# Altium PCB HSOW2.PcbDoc
Units mm, origin at the board's own origin, x right, y up, seen from the top; angles counter-clockwise.
Board outline 64 x 74 mm, 2 copper layers (Top Layer, Bottom Layer); 72 components, 62 nets, 292 pads, 75 vias.
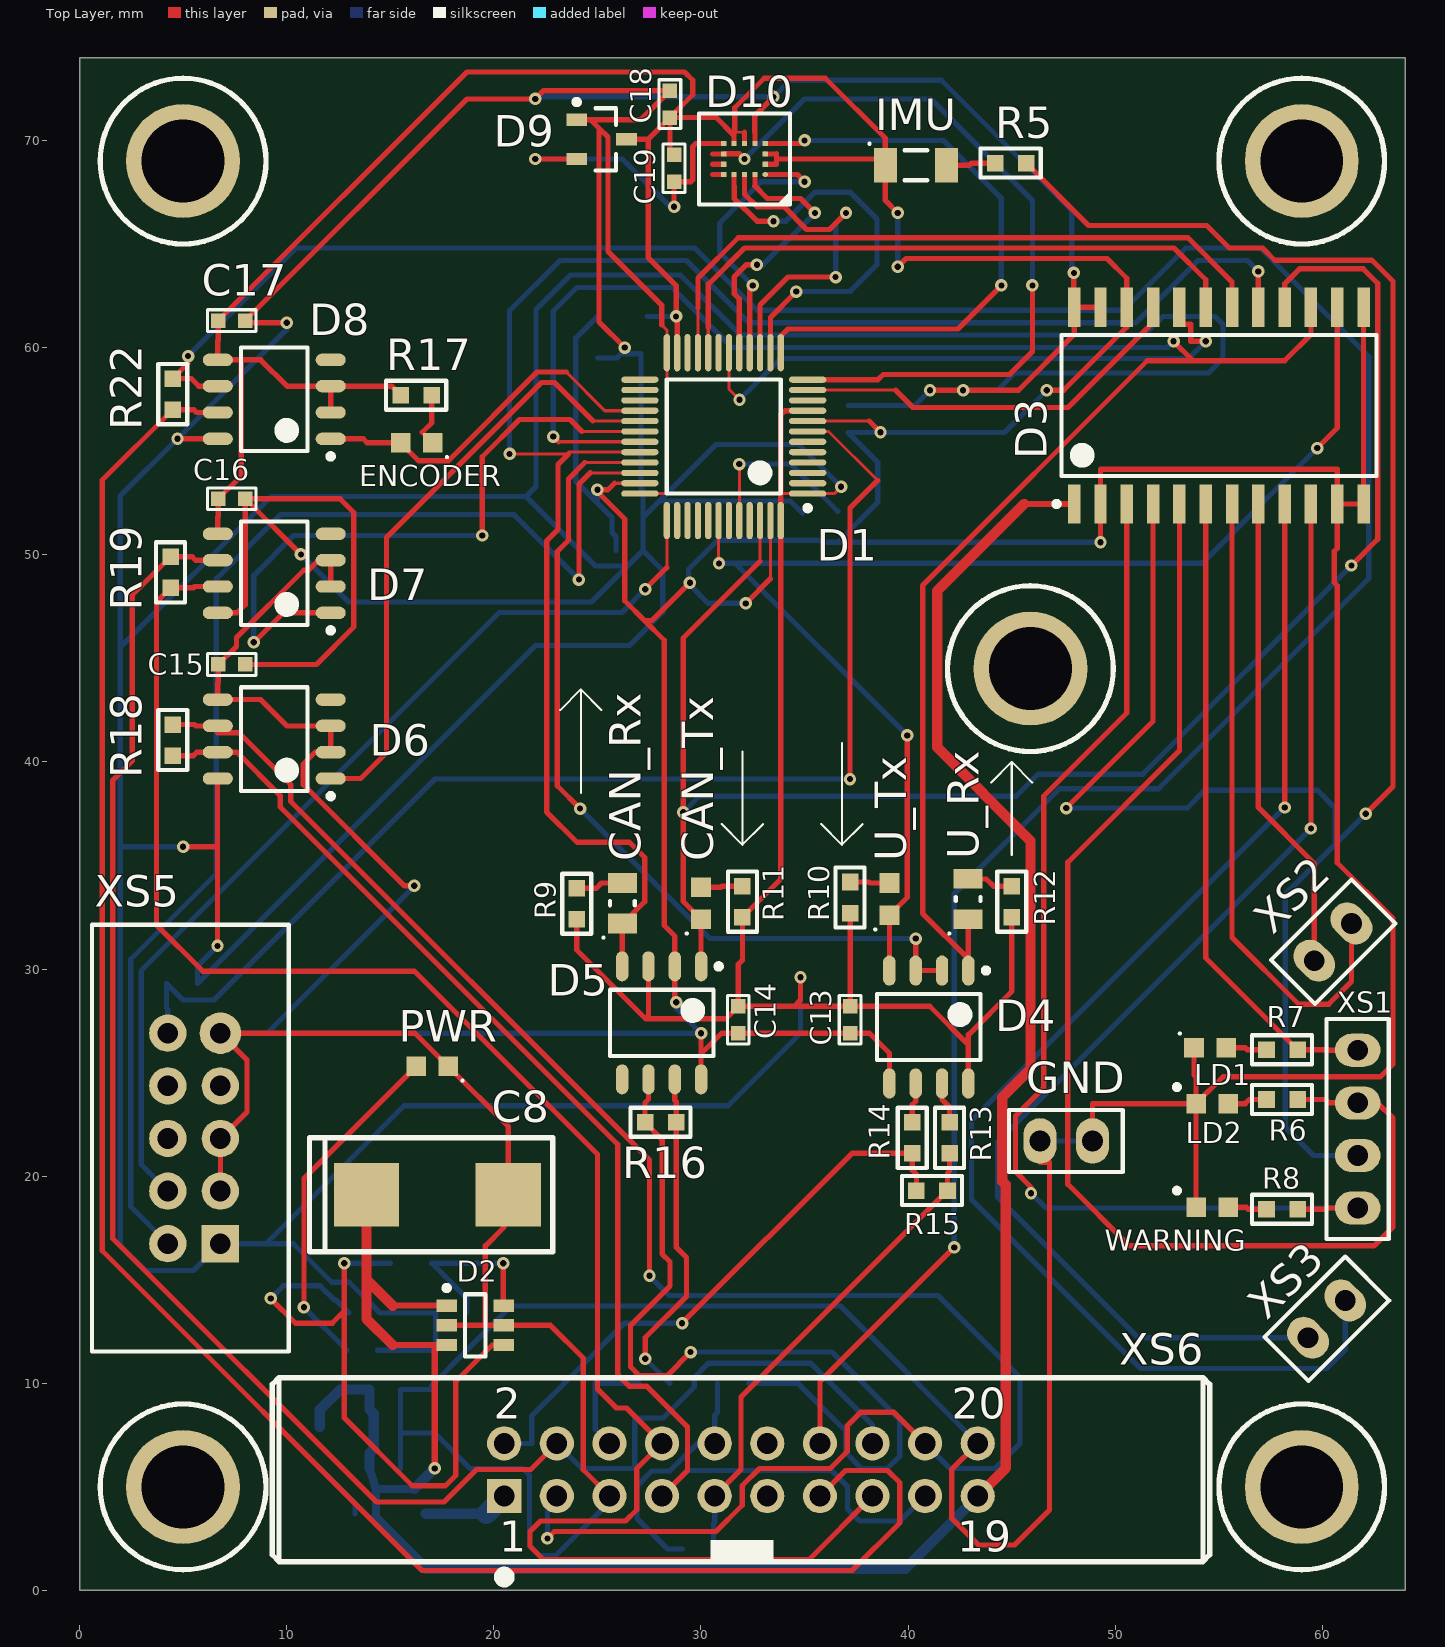
[diagram p0: Top Layer view]
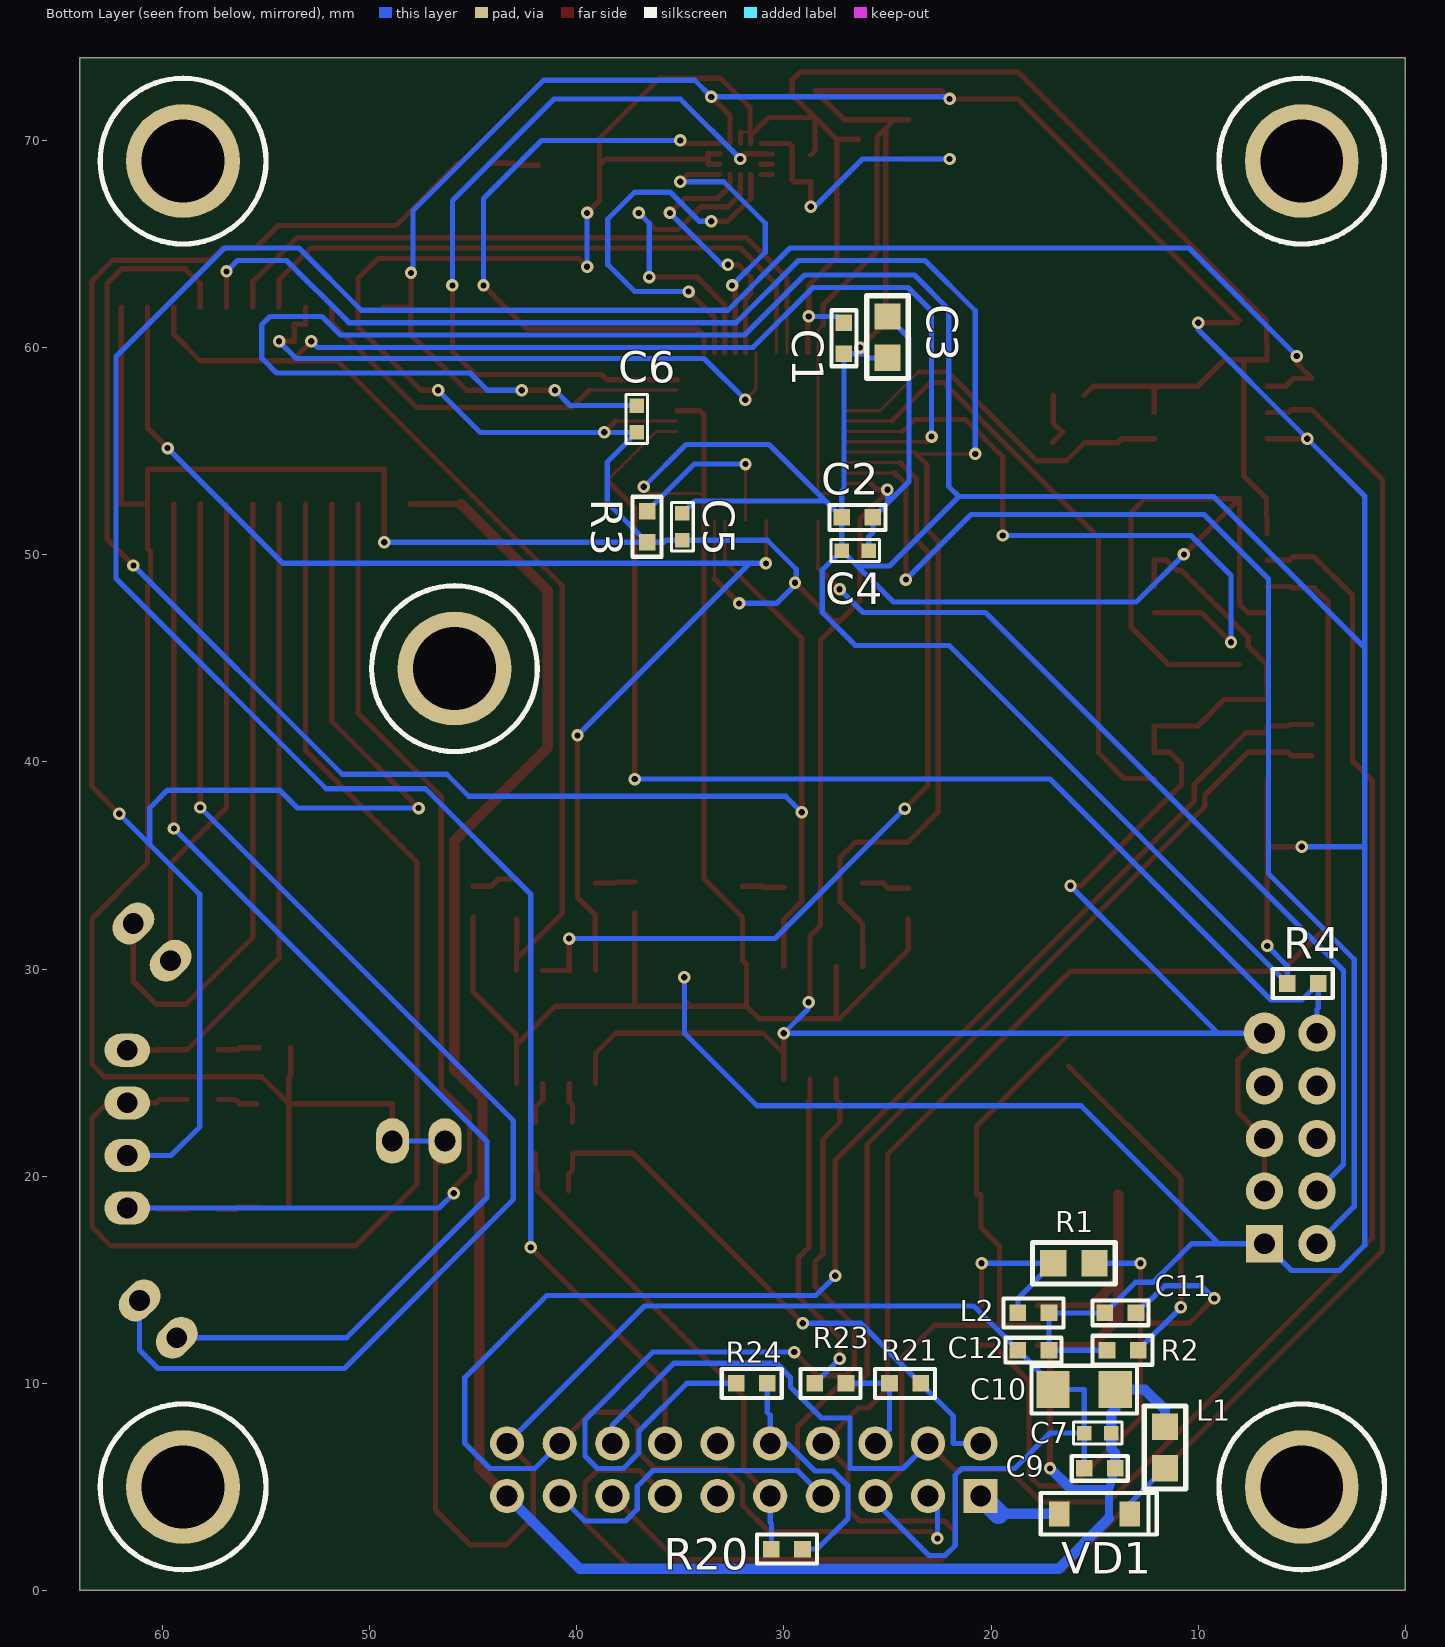
[diagram p1: Bottom Layer view, seen from below]
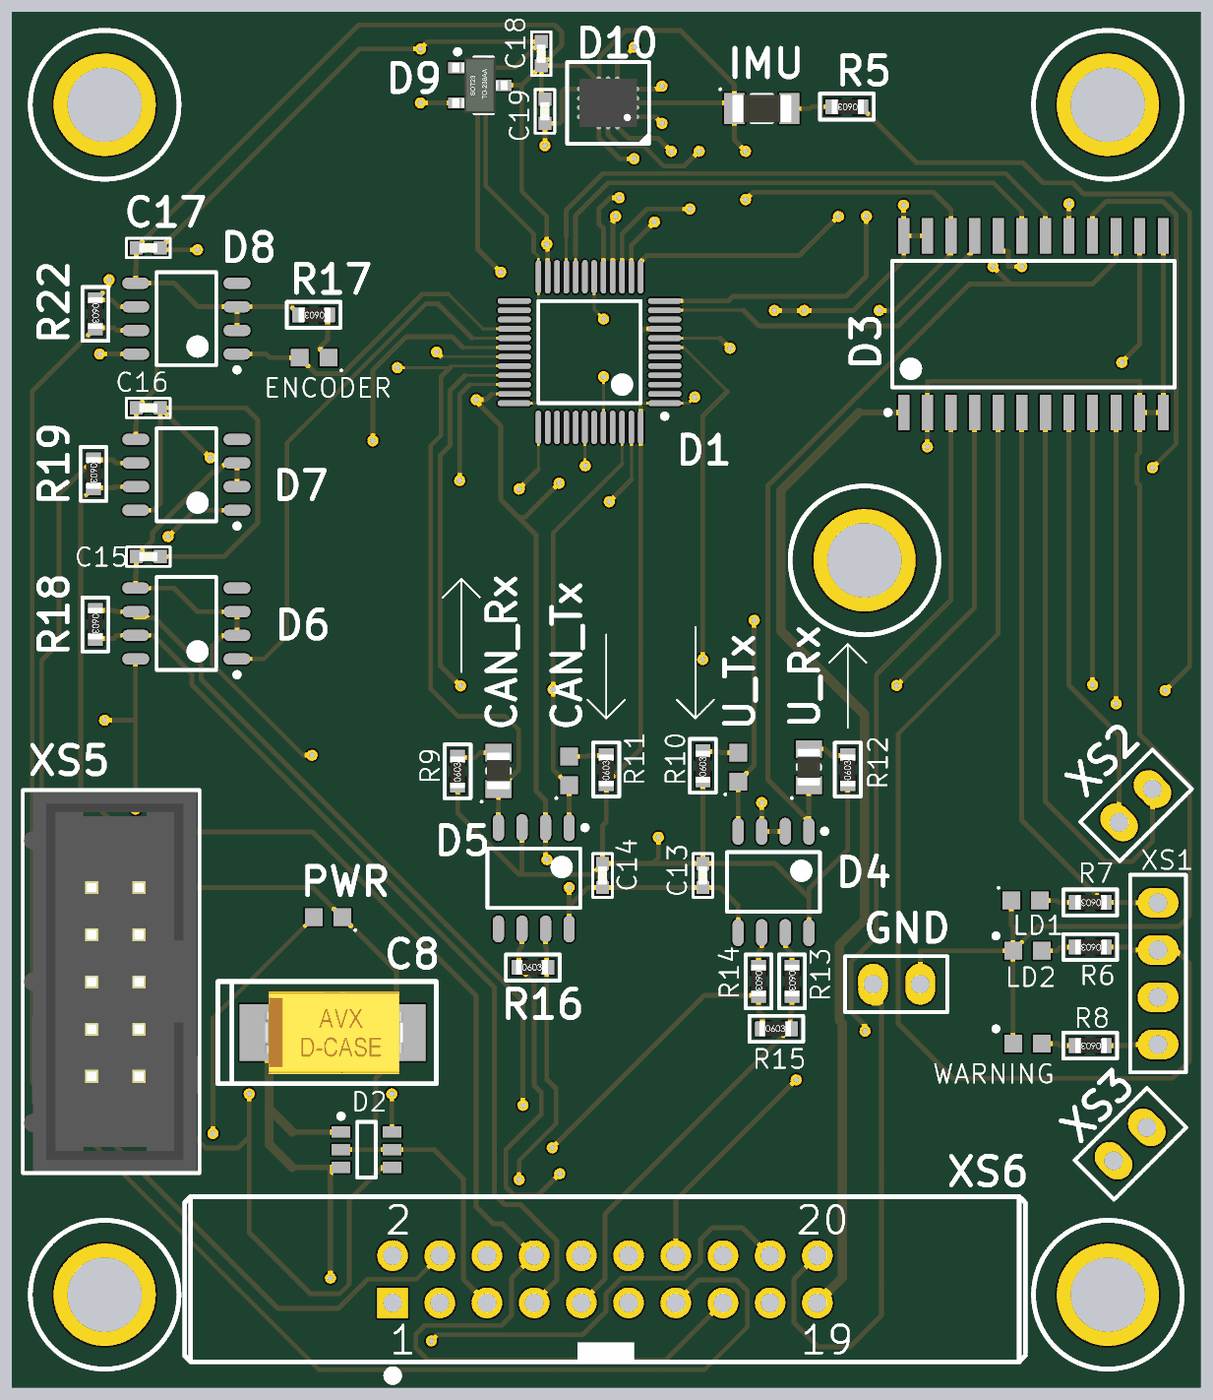
[diagram p2: 3D render of the assembled board from above, using the file's embedded part models]
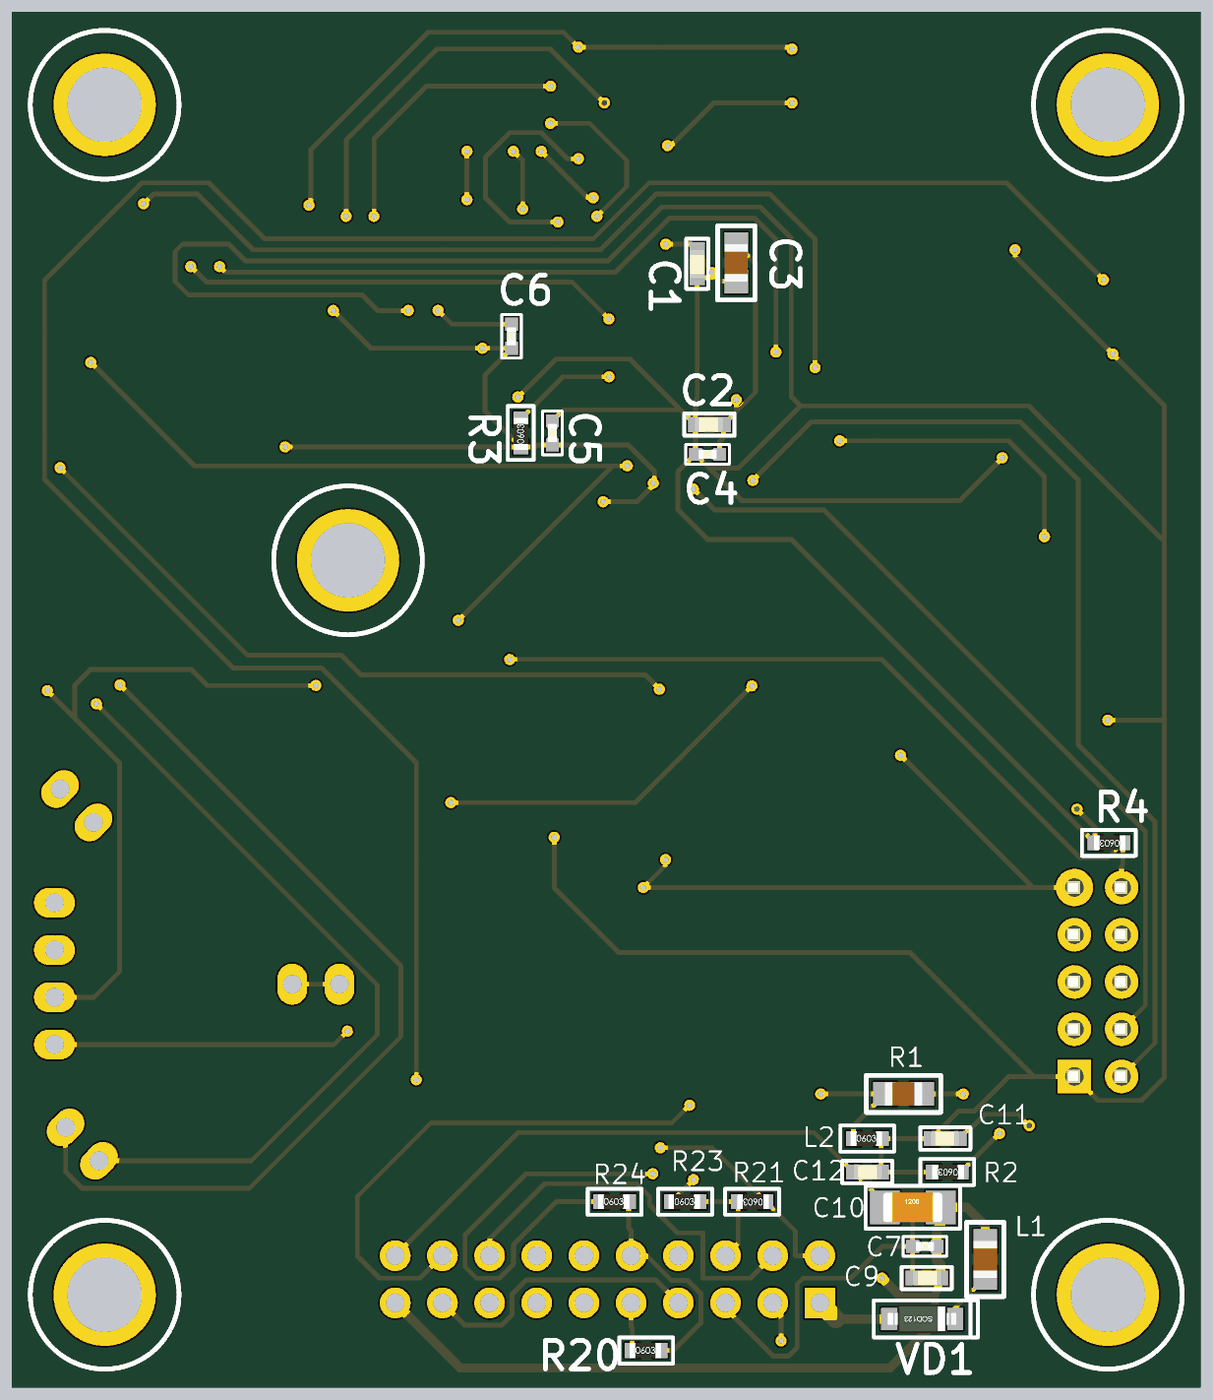
[diagram p3: 3D render of the assembled board from below, using the file's embedded part models]

## Layer stack, top to bottom
Top Solder: solder mask 0.0102, Solder Resist, Dk 3.5
Top Layer: signal copper 0.0356
Dielectric 1: dielectric 0.32, FR-4, Dk 4.8
Bottom Layer: signal copper 0.0356
Bottom Solder: solder mask 0.0102, Solder Resist, Dk 3.5

## Board outline
0,0 64,0 64,74 0,74

## Design rules (kind name [scope] priority, off if disabled: settings)
Clearance Clearance_Poly_VIA_0.4 [All] p1: gap=0.1 except(0.124: Arc-SMDPad Arc-THPad Track-Track Track-SMDPad Track-THPad SMDPad-THPad THPad-THPad; 0.254: Arc-Arc Arc-Track Arc-Via Track-Via; 0.4: Arc-Poly Track-Poly SMDPad-Poly THPad-Via THPad-Poly Via-Via Via-Poly Fill-Poly Poly-Poly)
DiffPairsRouting [All] p1: maxlimit=0.254 minlimit=0.124 mostfreqgap=0.254 toplayer_minwidth=0.124 toplayer_maxwidth=0.381 toplayer_prefwidth=0.254 bottomlayer_minwidth=0.124 bottomlayer_maxwidth=0.381 bottomlayer_prefwidth=0.254 maxuncoupledlength=15
Height [All] p1: minheight=0 maxheight=40 prefheight=12.7
HoleSize [All] p1: absolutevalues=TRUE maxlimit=4 minlimit=0.025 maxpercent=80.000 minpercent=20.000
MinimumSolderMaskSliver [All] p1: minsoldermaskwidth=0.04
PolygonConnect [All] p1: connectstyle=Relief reliefconductorwidth=0.254 reliefentries=4 polygonreliefangle="90 Angle" airgapwidth=0.254
RoomDefinition RS485_INTERFACE [InComponentClass('RS485_INTERFACE')] p1: confinementstyle=ConfineIn formatcopy=TRUE lockcomponents=FALSE outline 65.1,93.5 171.4,93.5 171.4,102.2 65.1,102.2
RoomDefinition Input_output_Connectors [InComponentClass('Input_output_Connectors')] p2: confinementstyle=ConfineIn formatcopy=TRUE lockcomponents=FALSE outline 65.1,43.8 177.1,43.8 177.1,92.3 65.1,92.3
RoomDefinition Controller_power [InComponentClass('Controller_power')] p3: confinementstyle=ConfineIn formatcopy=TRUE lockcomponents=FALSE outline 65.1,30.2 159.7,30.2 159.7,45.2 65.1,45.2
RoomDefinition Controller [InComponentClass('Controller')] p4: confinementstyle=ConfineIn formatcopy=TRUE lockcomponents=FALSE outline 65.1,7.7 181.4,7.7 181.4,31.5 65.1,31.5
RoomDefinition 3d_gyroscope [InComponentClass('3d_gyroscope')] p5: confinementstyle=ConfineIn formatcopy=TRUE lockcomponents=FALSE outline 65.1,1.5 86.4,1.5 86.4,9 65.1,9
RoutingPriority RoutingPriority_3V3 [InNet('3V3')] p1: routingpriority=0
RoutingPriority RoutingPriority_GND [InNet('GND')] p2: routingpriority=1
RoutingPriority RoutingPriority_5V [InNet('5V')] p3: routingpriority=2
RoutingPriority [All] p4: routingpriority=3
RoutingVias [All] p1: holewidth=0.3 width=0.6 viastyle="Through Hole" minholewidth=0.3 minwidth=0.6 maxholewidth=0.5 maxwidth=1.2
SMDNeckDown [All] p1: percent=102.000
SilkToSilkClearance [All] p1: silktosilkclearance=0.05
SilkToSolderMaskClearance [IsPad] p1: minsilkscreentomaskgap=0.05 clearancetoexposedcopper=TRUE
SolderMaskExpansion [All] p1: expansion=0.102
Width Width_5V_0.5mm [InNet('5V')] p1: maxlimit=0.5 minlimit=0.254 preferedwidth=0.5
Width Width_3V_0.5mm [InNet('3V3')] p2: maxlimit=0.5 minlimit=0.124 preferedwidth=0.254
Width Width_VCC_0.5mm [InNet('VCC')] p3: maxlimit=1 minlimit=0.254 preferedwidth=1
Width Width_SPI_0.125mm [InComponent('D10')] p4: maxlimit=0.254 minlimit=0.124 preferedwidth=0.124
Width Width_DEFAULT [All] p5: maxlimit=0.254 minlimit=0.124 preferedwidth=0.254
23 further rules are at their usual default settings.

## Classes and differential pairs
component class RS485_INTERFACE: C13 C14 CAN_Rx CAN_Tx D4 D5 R9 R10 R11 R12 R13 R14 R15 R16 U_Rx U_Tx
component class Input_output_Connectors: C15 C16 C17 D6 D7 D8 ENCODER R17 R18 R19 R20 R21 R22 R23 R24 XS6
component class Controller: D1 D3 GND IMU LD1 LD2 R3 R4 R5 R6 R7 R8 WARNING XS1 XS2 XS3 XS5
component class Controller_power: C1 C2 C3 C4 C5 C6 C7 C8 C9 C10 C11 C12 D2 L1 L2 PWR R1 R2 VD1
component class 3d_gyroscope: C18 C19 D9 D10

## Components (designator, comment, footprint, x,y, rotation, side; value= is the part's Value field where it differs from the comment)
C1 "4.7" SMD_0603_C 27.1,61.2 r270 bottom
C2 "10n" SMD_0603_C 25.7,51.8 r0 bottom
C3 "1u" SMD_0805 25,61.5 r270 bottom
C4 "0.1" SMD_0402_C 25.9,50.2 r0 bottom
C5 "0.1" SMD_0402_C 34.9,50.7 r90 bottom
C6 "0.1" SMD_0402_C 37.1,55.9 r90 bottom
C7 "0.1" SMD_0402_C 15.5,7.6 r180 bottom
C8 "100" SMD_7343 13.85,19.1 r0 top
C9 "4.7" SMD_0603_C 15.5,5.9 r180 bottom
C10 "2.2" SMD_1206 17,9.7 r180 bottom
C11 "3300p" SMD_0603_C 13,13.4 r0 bottom
C12 "10" SMD_0603_C 18.7,11.6 r180 bottom
C13 "0.1" SMD_0402_C 37.2,26.9 r90 top
C14 "0.1" SMD_0402_C 31.8,26.9 r90 top
C15 "0.1" SMD_0402_C 8,44.7 r180 top
C16 "0.1" SMD_0402_C 8,52.7 r180 top
C17 "0.1" SMD_0402_C 8,61.3 r180 top
C18 "0.1" SMD_0402_C 28.5,71.1 r90 top
C19 "0.1" SMD_0402_C 28.7,69.3 r270 top
CAN_Rx "ORANGE" SMD_LED_2012 26.2,33.175 r90 top
CAN_Tx "YELLOW" SMD_LED 30,33.175 r90 top
D1 "STM32F303CCT6" STM-LQFP48_N 31.1,55.7 r180 top
D2 "MAX1921" SOT23(95P280X145-6N) 19.1,12.8 r0 top
D3 "SN74LVC4245A" SOIC_24_DW(R-PDSO-G24) 55,57.2 r90 top
D4 "ADM1485E" "SOIC_N 8-Lead" 41,27.2 r270 top
D5 "MAX3051" "SOIC_N 8-Lead" 28.1,27.4 r270 top
D6 "ADM1485E" "SOIC_N 8-Lead" 9.4,41.1 r180 top
D7 "ADM1485E" "SOIC_N 8-Lead" 9.4,49.1 r180 top
D8 "ADM1485E" "SOIC_N 8-Lead" 9.4,57.5 r180 top
D9 "REF3033" SOT23-3L 25.2,70.05 r0 top
D10 "LSM6DSL" LGA14C50P5X4_300X250X86 32.1,69.1 r180 top
ENCODER "GREEN" SMD_LED 16.275,55.4 r180 top
GND "PLD-2_GND" PLS_2_simple 46.36,21.7 r0 top
IMU "BLUE" SMD_LED_3216 40.375,68.8 r0 top
L1 "22uH" SMD_0805 11.6,5.9 r90 bottom
L2 "10uH" SMD_0603 18.7,13.4 r180 bottom
LD1 "YELLOW" SMD_LED 54.675,23.5 r0 top
LD2 "GREEN" SMD_LED 54.575,26.2 r0 top
PWR "RED" SMD_LED 17.025,25.3 r180 top
R1 "8.25K" SMD_0805 15,15.8 r0 bottom
R2 "1800" SMD_0603 12.9,11.6 r0 bottom
R3 "510" SMD_0603 36.6,50.6 r90 bottom
R4 "1K" SMD_0603 4.2,29.3 r0 bottom
R5 "3K" SMD_0603 45.7,68.9 r180 top
R6 "3K" SMD_0603 58.8,23.7 r180 top
R7 "5.1K" SMD_0603 58.8,26.1 r180 top
R8 "3K" SMD_0603 58.8,18.4 r180 top
R9 "5.1K" SMD_0603 24,32.4 r90 top
R10 "5.1K" SMD_0603 37.2,32.7 r90 top
R11 "5.1K" SMD_0603 32,32.5 r90 top
R12 "5.1K" SMD_0603 45,32.5 r90 top
R13 "47" SMD_0603 42,22.6 r270 top
R14 "47" SMD_0603 40.2,22.6 r270 top
R15 "120" SMD_0603 40.4,19.3 r0 top
R16 "120" SMD_0603 27.3,22.6 r0 top
R17 "5.1K" SMD_0603 17,57.7 r180 top
R18 "120" SMD_0603 4.5,41.8 r270 top
R19 "120" SMD_0603 4.4,49.9 r270 top
R20 "0" SMD_0603 30.6,2 r180 bottom
R21 "0" SMD_0603 23.4,10 r0 bottom
R22 "120" SMD_0603 4.5,58.5 r270 top
R23 "0" SMD_0603 28.5,10 r180 bottom
R24 "0" SMD_0603 32.3,10 r180 bottom
U_Rx "ORANGE" SMD_LED_2012 42.9,33.375 r90 top
U_Tx "YELLOW" SMD_LED 39.1,33.375 r90 top
VD1 "Diode_schottky" SOD_123 16.7,3.7 r180 bottom
WARNING "RED" SMD_LED 54.675,18.5 r0 top
XS1 "PLD-4_LEDs_ECHO" PLS_4 61.7,18.46 r90 top
XS2 "PLD-2_CAN" PLS_2_simple 61.4,32.2 r225 top
XS3 "PLD-2_USART" PLS_2_simple 61.1,14 r225 top
XS5 "IDC-10MS" IDC-10MS 6.8,16.74 r90 top
XS6 "PLD-20" IDC2.54-20 31.93,7.1 r0 top

## Footprints (in the part's own frame and the unit in brackets; to place one, negate y for a bottom-side part, rotate by r counter-clockwise, add the part's x,y. Pads: shape width x height; smd on the part's side, far side on the other; paste and mask are expansions set on the pad)
IDC2.54-20 [mm] "Connector; IDC, Low Profile Male Header, Thru-Hole; 20 Position; Straight; Pitch 2.54 mm; Body 33.02 x 8.9 x 28mm (LxWxH)"
  rect 1.65x1.65 hole 1: 1(-11.43,-2.54)
  round 1.65 hole 1: 2(-11.43,0) 3(-8.89,-2.54) 4(-8.89,0) 5(-6.35,-2.54) 6(-6.35,0) 7(-3.81,-2.54) 8(-3.81,0) 9(-1.27,-2.54) 10(-1.27,0) 11(1.27,-2.54) 12(1.27,0) 13(3.81,-2.54) 14(3.81,0) 15(6.35,-2.54) 16(6.35,0) 17(8.89,-2.54) 18(8.89,0) 19(11.43,-2.54) 20(11.43,0)
  silkscreen extent -22.62,-6.7 22.63,3.18, body extent -22.13,-5.5 22.13,3, height 28
IDC-10MS [mm] "BH10 (IDC-10MS)"
  rect 1.8x1.8 hole 1: 1(0,0)
  round 1.8 hole 1: 2(2.54,0) 3(5.08,0) 4(7.62,0) 6(10.16,2.54) 7(7.62,2.54) 8(5.08,2.54) 9(2.54,2.54) 10(0,2.54)
  round 2 hole 1: 5(10.16,0)
  silkscreen extent -5.2,-3.3 15.4,6.2, body extent -5.1,-3.2 15.3,6.15, height 9.75
LGA14C50P5X4_300X250X86 [mm] "LGA, 14-Leads, Body 3,00x2,50mmx0,86mm, Pitch 0,50mm"
  oct 0.25x0.25 smd: 1(-1,0.75)
  rect 0.25x0.25 smd: 2(-1,0.25) 3(-1,-0.25) 4(-1,-0.75) 5(-0.5,-0.75) 6(0,-0.75) 7(0.5,-0.75) 8(1,-0.75) 9(1,-0.25) 10(1,0.25) 11(1,0.75) 12(0.5,0.75) 13(0,0.75) 14(-0.5,0.75)
  Top Layer lines w0.25: 1.55,0.75 1,0.75 ; 1.55,0.25 1,0.25 ; 1.55,-0.25 1,-0.25 ; 1.55,-0.75 1,-0.75 ; 0.5,1.3 0.5,0.75 ; 0.5,-0.75 0.5,-1.3 ; 0,1.3 0,0.75 ; 0,-0.75 0,-1.3 ; -0.5,1.3 -0.5,0.75 ; -0.5,-0.75 -0.5,-1.3 ; -1,0.75 -1.55,0.75 ; -1,0.25 -1.55,0.25 ; -1,-0.25 -1.55,-0.25 ; -1,-0.75 -1.55,-0.75
  silkscreen extent -2.2,-2.2 2.2,2.2, body extent -1.55,-1.3 1.55,1.3, height 0.86
PLS_2_simple [mm] "PLS_5_(DS1021-1x5)_SWD"
  oval 1.6x2.2 hole 1: 1(0,0) 2(2.54,0)
  silkscreen extent -1.5,-1.5 4,1.5, body extent -1.3,-1.3 3.8,1.3, height 8.25
PLS_4 [mm] "PLS_5_(DS1021-1x5)_SWD"
  oval 1.6x2.2 hole 1: 1(0,0) 2(2.54,0) 3(5.08,0) 4(7.62,0)
  silkscreen extent -1.5,-1.5 9.13,1.5, body extent -1.25,-1.25 8.87,1.25, height 8.25
SMD_0402_C [mm] "SMD_0402_C"
  rect 0.7x0.7 smd: 1(0,0) 2(1.3,0)
  silkscreen extent -0.53,-0.53 1.83,0.53, body extent 0.15,-0.26 1.15,0.27, height 0.36
SMD_0603 [mm] "SMD_0603"
  rect 0.8x0.8 smd: 1(0,0) 2(1.5,0)
  silkscreen extent -0.7,-0.7 2.2,0.7, body extent -0.15,-0.4 1.55,0.4, height 0.56
SMD_0603_C [mm] "SMD_0603_C"
  rect 0.8x0.8 smd: 1(0,0) 2(1.5,0)
  silkscreen extent -0.6,-0.6 2.1,0.6, body extent -0.02,-0.41 1.58,0.41, height 0.57
SMD_0805 [mm] "SMD_0805"
  rect 1.27x1.27 smd: 1(0,0) 2(2,0)
  silkscreen extent -1,-1 3,1, body extent 0,-0.62 2,0.63, height 0.6
SMD_1206 [mm] "SMD_1206"
  rect 1.6x1.8 smd: 1(0,0) 2(3,0)
  silkscreen extent -1.05,-1.15 4.05,1.15, body extent -0.1,-0.8 3.1,0.8, height 1
SMD_7343 [mm] "SMD_Type_D_7343"
  rect 3.15x3.05 smd: 1(0,0) 2(6.85,0)
  silkscreen extent -2.75,-2.75 9,2.75, body extent -0.2,-2.22 7.2,2.23, height 3.01
SMD_LED [mm] "Chip Diode, 2-Leads, Body 1,60x0,80mm, IPC Medium Density"
  rect 0.95x0.95 smd: 1(-0.775,0) 2(0.775,0)
  silkscreen extent -1.51,0.64 -1.41,0.74, body extent -0.8,-0.4 0.8,0.4, height 0.6
SMD_LED_2012 [mm] "Chip2PinSM127P600-8N"
  rect 0.95x1.4 smd: 1(-0.975,0) 2(0.975,0)
  silkscreen extent -1.71,-0.6 0.1,0.96, body extent -1,-0.63 1,0.63, height 1.1
SMD_LED_3216 [mm] "Chip2PinSM127P600-8N"
  rect 1.1x1.65 smd: 1(-1.475,0) 2(1.475,0)
  silkscreen extent -2.29,-0.73 0.55,1.09, body extent -1.6,-0.75 1.6,0.75, height 1.1
SOD_123 [mm] "SOD_123_DIODE"
  rect 1x1.2 smd: 1(0,0) 2(3.4,0)
  silkscreen extent -0.9,-1 4.7,1, body extent -0.15,-0.77 3.55,0.78, height 1.35
SOIC_24_DW(R-PDSO-G24) [mm] "SOIC, 24-Leads, Body 15,40x7,50mm, Pitch 1,27mm, IPC Medium Density"
  rect 1.9x0.6 smd: 1(-4.75,6.985) 2(-4.75,5.715) 3(-4.75,4.445) 4(-4.75,3.175) 5(-4.75,1.905) 6(-4.75,0.635) 7(-4.75,-0.635) 8(-4.75,-1.905) 9(-4.75,-3.175) 10(-4.75,-4.445) 11(-4.75,-5.715) 12(-4.75,-6.985) 13(4.75,-6.985) 14(4.75,-5.715) 15(4.75,-4.445) 16(4.75,-3.175) 17(4.75,-1.905) 18(4.75,-0.635) 19(4.75,0.635) 20(4.75,1.905) 21(4.75,3.175) 22(4.75,4.445) 23(4.75,5.715) 24(4.75,6.985)
  silkscreen extent -4.87,-7.6 3.4,7.96, body extent -3.8,-7.6 3.8,7.6, height 2.65
"SOIC_N 8-Lead" [mm] "SOIC, 8-Leads, R-8, Body 4,90x3,90mm, Pitch 1,27mm, IPC Medium Density"
  oval 1.45x0.6 smd: 1(-2.725,1.905) 2(-2.725,0.635) 3(-2.725,-0.635) 4(-2.725,-1.905) 5(2.725,-1.905) 6(2.725,-0.635) 7(2.725,0.635) 8(2.725,1.905)
  silkscreen extent -2.85,-2.5 1.6,2.88, body extent -2,-2.5 2,2.5, height 1.75
SOT23(95P280X145-6N) [mm] "SOT23, 6-Leads, Body 2,90x2,80mm, Pitch 0,95mm, IPC Medium Density"
  rect 1x0.6 smd: 1(-1.375,0.95) 2(-1.375,0) 3(-1.375,-0.95) 4(1.375,-0.95) 5(1.375,0) 6(1.375,0.95)
  silkscreen extent -1.5,-1.5 0.5,1.92, body extent -0.88,-1.5 0.87,1.5, height 1.45
SOT23-3L [mm] "SOT23, 3-Leads, Body 2,90x2,45mm, Pitch 0,95mm, IPC Medium Density"
  rect 1x0.6 smd: 1(-1.2,0.95) 2(-1.2,-0.95) 3(1.2,0)
  silkscreen extent -1.32,-1.5 0.7,1.92, body extent -1.5,-1.5 1.5,1.5, height 1.3
STM-LQFP48_N [mm] "QFP, 48-Leads, Body 7x7mm, Pitch 0.5mm, IPC Medium Density"
  oval 1.8x0.3 smd: 1(-4.05,2.75) 2(-4.05,2.25) 3(-4.05,1.75) 4(-4.05,1.25) 5(-4.05,0.75) 6(-4.05,0.25) 7(-4.05,-0.25) 8(-4.05,-0.75) 9(-4.05,-1.25) 10(-4.05,-1.75) 11(-4.05,-2.25) 12(-4.05,-2.75) 25(4.05,-2.75) 26(4.05,-2.25) 27(4.05,-1.75) 28(4.05,-1.25) 29(4.05,-0.75) 30(4.05,-0.25) 31(4.05,0.25) 32(4.05,0.75) 33(4.05,1.25) 34(4.05,1.75) 35(4.05,2.25) 36(4.05,2.75)
  oval 0.3x1.8 smd: 13(-2.75,-4.05) 14(-2.25,-4.05) 15(-1.75,-4.05) 16(-1.25,-4.05) 17(-0.75,-4.05) 18(-0.25,-4.05) 19(0.25,-4.05) 20(0.75,-4.05) 21(1.25,-4.05) 22(1.75,-4.05) 23(2.25,-4.05) 24(2.75,-4.05) 37(2.75,4.05) 38(2.25,4.05) 39(1.75,4.05) 40(1.25,4.05) 41(0.75,4.05) 42(0.25,4.05) 43(-0.25,4.05) 44(-0.75,4.05) 45(-1.25,4.05) 46(-1.75,4.05) 47(-2.25,4.05) 48(-2.75,4.05)
  silkscreen extent -4.18,-2.75 2.75,3.57, body extent -3.5,-3.5 3.5,3.5, height 1.6

## Part data
C1 C2 C3 C4 C5 C6 C7 C9 C10 C11 C12 C13 C14 C15 C16 C17 C18 C19: library part Capacitor
C8: library part "Capacitor polar"
CAN_Rx CAN_Tx ENCODER IMU LD1 LD2 PWR U_Rx U_Tx WARNING: library part LED_Diode
D1: "ARM Cortex-M4 32-bit MCU, 256 KB Flash, 40 KB Internal RAM, 37 I/Os, 48-pin LQFP, -40 to 85 degC, Tray"
D3: "optic bus transiever with 3-state"
D5: "CAN Transeiver, 3.3V, 1Mbps, 8pin"
D6 D7 D8: library part ADM1485
D9: "VOLTAGE STATIC SOURCE 3.3V"
D10: "3D accelerometer and 3D gyroscope"
L1 L2: library part Inductor
R1 R3 R4 R5 R6 R7 R8 R13 R14 R15 R23 R24: library part Resistor
R2 R9 R10 R11 R12 R16 R17 R18 R19 R22: library part Resistor, "0603 resistor"
R20 R21: library part Resistor, "dont fitting"
XS6: "HSOW2 encoder and external connector"

## Free pads (board coordinates)
  round 5.5 hole 4: 1(5,5) 2(5,69) 3(59,69) 4(59,5) 5(45.9,44.5)

## Via types
v1: diameter 0.6, hole 0.3, Top Layer to Bottom Layer, 75 vias

## Nets (pads, with @x,y where several pads share a name; then routed paths per layer and width w, separated by ;. In a path a pad name is that pad's centre, name@x,y a point inside that pad or via, vN(x,y) a via of type N, cw(c..) or ccw(c..) an arc to the next point about the centre after c; other vN are vias at no path point)
3V3: C1.2 C2.2 C3.2 C4.2 C5.2 C6.2 C11.2 C12.2 C13.2 C14.2 C15.1 C16.1 C17.1 C18.2 D1.1 D1.9 D1.24 D1.36 D1.48 D3.23 D3.24 D4.8 D5.3 D6.8 D7.8 D8.8 D9.1 D10.5 L2.2 R2.2 R4.2 R9.1 R10.1 R11.1 R12.1 XS5.1 | length 507
  Top Layer w0.15: D1.36 28.328,52.95 28.35,52.972 D1.24 28.35,60.85 28.1,61.1 ; 33.85,53 33.9,52.95 D1.1 36.431,52.95 v1(36.761,53.28)
  Top Layer w0.254: v1(4.731,55.595) D8.8 ; v1(5,35.9) 6.562,35.9 6.662,36 ; v1(6.662,31.115) 6.662,36 ; D6.8 6.662,39.195 6.662,36 ; D7.8 7.606,47.195 8,47.589 C16.1 ; C15.1 11.433,44.7 13.24,46.508 13.24,52.04 12.58,52.7 C16.1 ; C17.1 18.7,72 v1(22,72) 22.4,72.4 C18.2 27.1,71 24.664,71 ; C17.1@8.1,61.2 v1(10,61.2) ; v1(10.687,50.013) C16.1 ; R9.1 24,30.922 27.322,27.6 ; D9.1 24.664,71 ; v1(26.321,59.995) 25.077,61.24 25.077,70.587 ; D5.3 27.465,27.743 27.322,27.6 ; 28.1,61.1 28.1,62.052 25.509,64.643 25.509,70.155 25.077,70.587 ; 32.6,70.4 32.6,71.2 v1(33.5,72.1) ; v1(34.805,29.6) 34.805,28.505 34.5,28.2 ; D1.9 34.05,56.95 33.85,56.75 33.85,53 D1.48 33.85,34.35 R11.1 32,30.426 31.8,30.226 C14.2 ; R10.1 C13.2 ; v1(41.053,57.938) v1(42.654,57.938) 45.323,57.938 48.015,60.63 D3.24 D3.23 ; D4.8 42.905,26.34 ; R12.1 45,28.918 42.905,26.823 42.905,26.34 ; D3.24@48,61.965 v1(48,63.6) ; 24.664,71 25.077,70.587 ; 27.322,27.6 31.2,27.6 C14.2 ; C14.2 34.5,28.2 ; 34.5,28.2 C13.2 ; C13.2 41.045,28.2 42.905,26.34
  Bottom Layer w0.254: v1(5,35.9) 1.963,35.9 ; v1(6.662,31.115) 5.7,30.153 R4.2 22.019,45.619 26.55,45.619 28.15,47.219 28.15,49.25 C4.2 ; v1(10,61.2) 10,60.864 v1(4.731,55.595) 1.963,52.826 1.963,45.517 ; v1(10.687,50.013) 12.987,47.713 24.713,47.713 26.454,49.454 ; R2.2 C12.2 L2.2 C11.2 13.018,14.882 12.176,14.882 10.318,16.74 9,16.74 ; v1(22,72) 22.1,72.1 v1(33.5,72.1) 34.3,72.9 41.6,72.9 47.9,66.6 47.9,63.7 v1(48,63.6) ; C3.2 25.94,59.5 26.14,59.7 C1.2 27.1,53.175 27.2,53.075 C2.2 ; v1(34.805,29.6) 34.8,29.595 34.8,26.9 31.3,23.4 15.66,23.4 9,16.74 ; C5.2 34.311,52.589 27.989,52.589 ; v1(36.761,53.28) 34.72,55.321 30.721,55.321 27.989,52.589 ; C6.2 40.316,57.2 v1(41.053,57.938) ; v1(42.654,57.938) 44.305,57.938 45.143,58.776 54.49,58.776 55.201,59.487 55.201,61.113 54.814,61.5 52.3,61.5 51.4,60.6 31.9,60.6 29,63.5 23.7,63.5 22.04,61.84 22.04,53.301 21.546,52.807 ; 1.963,35.9 1.963,45.517 ; 1.963,35.9 1.963,16.663 3.182,15.443 5.503,15.443 XS5.1 9,16.74 ; 1.963,45.517 9.253,52.807 21.546,52.807 ; 21.546,52.807 24.899,49.454 26.454,49.454 ; 26.454,49.454 C4.2 ; C4.2 C2.2 ; C2.2 27.989,52.589
5V: C7.2 C8.1 C9.2 C10.2 D2.1 D2.3 D3.1 L1.2 XS6.19 | length 120.7
  Top Layer w0.3: 15.12,11.85 17.152,11.85 ; 15.12,13.75 D2.1 ; v1(17.152,5.893) 17.152,11.85 ; D2.3 17.152,11.85 ; 45.6,52.45 D3.1
  Top Layer w0.5: C8.1 13.85,15.02 ; 15.12,11.85 13.85,13.12 13.85,15.02 ; 15.12,13.75 13.85,15.02 ; XS6.19 44.711,5.911 44.711,19.588 44.548,19.751 44.548,23.812 45.905,25.169 45.905,36.195 41.4,40.7 41.4,48.25 45.6,52.45
  Bottom Layer w0.4: C9.2 14.307,4.902 ; 14.307,3.48 14.307,4.902 ; 16.161,4.902 14.307,4.902
  Bottom Layer w0.5: L1.2 11.6,8.72 12.58,9.7 C10.2 14,8.735 14.2,8.535 C7.2 14.2,6.83 14,6.63 C9.2 ; 14.307,3.48 16.73,1.057 39.857,1.057 XS6.19 ; 16.161,4.902 v1(17.152,5.893)
BLUE: D3.4 R5.1 XS1.2 | length 99
  Top Layer w0.254: R5.1 48.712,65.888 54.412,65.888 55.5,64.8 57.111,64.8 57.7,64.211 62.394,64.211 63.405,63.2 63.405,38.811 v1(62.085,37.491) ; v1(47.632,37.77) 51.825,41.963 D3.4
  Bottom Layer w0.254: v1(47.632,37.77) 53.474,37.77 54.338,38.634 59.748,38.634 60.611,37.77 60.611,36.017 ; XS1.2 59.576,21 58.198,22.378 58.198,33.604 60.611,36.017 ; v1(62.085,37.491) 60.611,36.017
BLUE_LED_IMU: D1.18 D3.20 | length 29.1
  Top Layer w0.15: D1.18 31.35,57.989 v1(31.859,57.48)
  Top Layer w0.254: D3.20 53.095,61.127 53.641,61.127 53.641,60.3 v1(54.365,60.3)
  Bottom Layer w0.254: v1(31.859,57.48) 33.851,59.473 53.538,59.473 v1(54.365,60.3)
BOOT0: D1.44 R3.2 | length 8.4
  Top Layer w0.15: D1.44 v1(31.85,54.373)
  Bottom Layer w0.254: v1(31.85,54.373) 34.327,54.373 R3.2
CAN_RX: CAN_Rx.1 D1.32 D3.17 D5.4 | length 84
  Top Layer w0.15: v1(20.759,54.864) 23.607,54.864 23.607,54.95 D1.32
  Top Layer w0.254: 23.607,54.864 23.1,54.357 23.1,51.214 22.551,50.665 22.551,37.578 24.01,36.119 26.55,36.119 27.287,35.382 27.287,33.251 26.236,32.2 CAN_Rx.1 26.2,31.146 26.195,31.141 D5.4 ; D3.17 v1(56.905,63.676)
  Bottom Layer w0.254: v1(20.759,54.864) 20.759,61.773 23.186,64.2 29.3,64.2 32.3,61.2 51,61.2 54,64.2 56.381,64.2 v1(56.905,63.676)
CAN_RX_ECHO: D3.7 XS2.1 | length 31.3
  Top Layer w0.254: D3.7 55.635,31.52 58.855,28.3 60.3,28.3 61.4,29.4 XS2.1
CAN_TX: CAN_Tx.1 D1.46 D3.16 D5.1 | length 81
  Top Layer w0.15: 32.85,49.683 D1.46
  Top Layer w0.254: D5.1 30.005,31.242 30,31.247 CAN_Tx.1 29.141,33.259 v1(29.141,37.567) 29.141,45.974 32.85,49.683 ; D3.16 58.175,63.075 58.9,63.8 61.969,63.8 62.669,63.1 62.669,50.749 v1(61.399,49.479)
  Bottom Layer w0.254: v1(29.141,37.567) 29.914,38.34 45.213,38.34 46.273,39.4 51.319,39.4 v1(61.399,49.479)
CAN_TX_ECHO: D3.8 XS2.2 | length 23.2
  Top Layer w0.254: D3.8 56.905,37.793 59.604,35.094 XS2.2
CANH: D5.7 R16.2 R23.1 | length 16.2
  Top Layer w0.254: v1(27.312,11.188) 27.312,12.212 29.3,14.2 29.3,16.075 28.8,16.575 R16.2 28.8,23.597 28.735,23.662 D5.7
  Bottom Layer w0.254: v1(27.312,11.188) R23.1
CANL: D5.6 R16.1 R24.1 | length 41.8
  Top Layer w0.254: D5.6 27.465,23.711 27.3,23.546 R16.1 28.125,21.775 28.125,16.245 28.5,15.87 28.5,14.7 26.6,12.8 26.6,10.8 27.039,10.361 28.351,10.361 v1(29.496,11.506)
  Bottom Layer w0.254: v1(29.496,11.506) 36.329,11.506 39.6,8.235 39.6,6.5 38.994,5.894 37.75,5.894 36.989,6.655 36.989,7.696 34.686,10 R24.1
ENCODER_A: D1.29 D6.1 | length 29.7
  Top Layer w0.15: 24.789,56.45 D1.29
  Top Layer w0.254: D6.1 13.573,39.195 14.815,40.437 14.815,50.824 22.298,58.307 22.932,58.307 24.789,56.45
ENCODER_A+: D6.6 R18.1 XS6.3 XS6.18 | length 91.6
  Top Layer w0.254: R18.1 5.544,41.8 5.609,41.735 D6.6 6.675,41.402 7.703,41.402 10.194,38.911 10.194,38.095 27.515,20.774 v1(27.515,15.189) ; v1(22.588,2.515) 22.918,2.845 30.724,2.845 31.994,4.115 31.994,5.06 32.828,5.894 36.24,5.894 37.066,6.72 37.066,7.966 37.7,8.6 39.32,8.6 XS6.18
  Bottom Layer w0.254: v1(22.588,2.515) 22.588,4.108 XS6.3 ; v1(27.515,15.189) 28.463,14.241 41.443,14.241 45.4,10.284 45.4,7.1 44.193,5.893 42.027,5.893 XS6.18
ENCODER_A-: D6.7 R18.2 XS6.7 XS6.17 | length 64.4
  Top Layer w0.254: R18.2 5.493,40.3 5.658,40.465 D6.7 7.599,40.465 9.686,38.378 9.686,37.835 25.977,21.544 25.977,10.423 26.547,9.853 27.391,9.853 29.344,7.9 29.344,5.784 XS6.7
  Bottom Layer w0.254: XS6.7 29.351,5.791 36.309,5.791 37.074,5.026 37.074,3.926 37.646,3.354 39.614,3.354 XS6.17
ENCODER_B: D1.30 D7.1 | length 31.8
  Top Layer w0.15: 24.259,55.95 D1.30
  Top Layer w0.254: v1(8.414,45.771) 9.838,47.195 D7.1 ; v1(19.438,50.927) 19.438,54.729 21.239,56.529 23.68,56.529 24.259,55.95
  Bottom Layer w0.254: v1(8.414,45.771) 8.414,49.003 10.338,50.927 v1(19.438,50.927)
ENCODER_B+: D7.6 R19.1 XS6.4 XS6.16 | length 86
  Top Layer w0.254: D7.6 5.608,49.735 5.443,49.9 R19.1 2.547,48.047 2.547,40.049 1.6,39.102 1.6,17 14.333,4.267 17.591,4.267 19.166,5.842 21.782,5.842 XS6.4
  Bottom Layer w0.254: XS6.4 24.247,5.893 26.804,5.893 26.804,8.331 28.176,8.331 29.674,9.83 29.674,10.287 30.36,10.973 35.295,10.973 38.28,7.988 XS6.16
ENCODER_B-: D7.7 R19.2 XS6.8 XS6.15 | length 88.3
  Top Layer w0.254: D7.7 5.558,48.465 5.493,48.4 R19.2 3.715,47.715 3.715,32.131 5.951,29.896 16.161,29.896 25.001,21.057 25.001,9.728 25.915,8.814 26.406,8.814 XS6.8 26.9,5.88 26.9,3.9 26.353,3.353 22.253,3.353 21.749,2.849 21.749,2.134 22.397,1.486 35.206,1.486 XS6.15
ENCODER_N: D1.28 D8.1 ENCODER.2 | length 17.9
  Top Layer w0.15: 23.497,58.815 25.362,56.95 D1.28
  Top Layer w0.254: D8.1 13.698,55.595 13.893,55.4 ENCODER.2 16.366,54.534 17.806,54.534 22.088,58.815 23.497,58.815
ENCODER_N+: D8.6 R22.1 XS6.14 | length 133.8
  Top Layer w0.254: v1(5.239,59.589) 5.239,59.239 R22.1 5.392,58.5 5.757,58.135 D8.6 ; XS6.14 35.74,10.079 v1(42.222,16.561)
  Bottom Layer w0.254: v1(5.239,59.589) 10.451,64.8 29.7,64.8 32.7,61.8 50.4,61.8 53.4,64.8 57,64.8 62.237,59.563 62.237,48.844 52.093,38.7 47.3,38.7 42.222,33.622 v1(42.222,16.561)
ENCODER_N-: D8.7 R22.2 XS6.13 | length 96.6
  Top Layer w0.254: D8.7 5.654,56.865 5.519,57 R22.2 1.1,53.6 1.1,16.4 16.535,0.965 37.294,0.965 39.6,3.271 39.6,5.2 39.009,5.791 36.971,5.791 XS6.13
GND: C1.1 C2.1 C3.1 C4.1 C5.1 C6.1 C7.1 C8.2 C9.1 C10.1 C12.1 C13.1 C14.1 C15.2 C16.2 C17.2 C18.1 C19.1 D1.8 D1.23 D1.35 D1.47 D2.2 D2.5 D3.2 D3.11 D3.12 D3.13 D3.22 D4.5 D5.2 D5.8 D6.2 D6.3 D6.5 D7.2 D7.3 D7.5 D8.2 D8.3 D8.5 D9.3 D10.2 D10.3 D10.6 D10.7 GND.1 GND.2 IMU.1 LD1.1 LD2.1 PWR.1 R3.1 R17.2 WARNING.1 XS5.2 XS5.3 XS5.5 XS6.5 XS6.20 | length 497.8
  Top Layer w0.125: 31.6,70.4 31.63,70.4 32.1,70.4
  Top Layer w0.15: 25.821,53.45 D1.35 ; D1.47 33.35,50.902 33.357,50.895 33.357,48.844 ; D1.8 38.121,56.45
  Top Layer w0.254: D7.5 6.675,51.816 6.7,51.841 C16.2 7.805,53.805 7.805,59.405 ; XS5.2 XS5.3 8.084,23.104 8.084,25.616 XS5.5 16.2,26.9 PWR.1 20.7,22.4 C8.2 20.479,19.1 20.479,17.526 19.59,16.637 19.59,12.8 ; D7.2 D7.3 11.535,49.735 11.05,49.25 10.825,49.25 7.577,46.002 7.577,45.577 C15.2 6.7,43.84 6.675,43.815 D6.5 8.745,43.005 10.015,41.735 D6.3 D6.2 11.365,40.465 10.8,39.9 10.8,38.9 15.685,34.015 v1(16.162,34.015) ; D8.2 D8.3 ; R17.2 15.065,58.135 D8.3 ; D2.2 19.59,12.8 ; XS6.5 24.315,5.825 24.315,11.225 22.74,12.8 D2.5 19.59,12.8 ; 25.821,53.45 25.507,53.136 v1(25,53.136) 25,53.036 26.321,51.715 26.321,47.778 27.274,46.825 ; D9.3 27.45,70.05 ; C19.1 28.5,69.5 C18.1 ; v1(28.805,28.4) 28.735,28.47 D5.2 28.735,31.598 28.226,32.106 28.226,45.873 27.274,46.825 ; D1.23 28.85,61.45 v1(28.8,61.5) 28.8,63 27.45,64.35 27.45,70.05 ; v1(29.463,48.651) 27.638,46.825 27.274,46.825 ; D5.8 30.005,25.91 ; v1(30.005,26.9) 30.005,25.91 ; 31.554,70.282 30.736,71.1 C18.1 ; 31.63,70.4 31.63,71.577 33.053,73 36,73 38.9,70.1 IMU.1 ; v1(32.163,47.651) 33.357,48.844 ; 33.65,68.85 33.65,69.1 ; 33.65,69.35 33.65,69.1 ; 38.121,56.45 v1(38.666,55.906) ; D4.5 39.095,25.934 38.129,26.9 C13.1 C14.1 30.995,26.9 30.005,25.91 ; v1(39.5,63.9) 39.9,64.3 49.6,64.3 50.555,63.345 D3.22 50.555,60.986 47.507,57.938 v1(46.692,57.938) ; v1(39.5,66.5) 38.9,67.1 IMU.1 ; XS6.20 42.1,5.84 42.1,3.5 43.4,2.2 45.133,2.2 46.819,3.886 46.819,20.676 46.36,20.676 GND.1 ; GND.2 48.9,23.5 LD1.1 ; v1(49.285,50.6) D3.2 49.285,54.128 60.715,54.128 D3.11 ; LD2.1 53.8,24.891 53.9,24.791 LD1.1 ; WARNING.1 LD1.1 ; D3.13 D3.12 D3.11 ; 7.805,59.405 D8.5 6.675,60.325 6.7,60.35 C17.2 18.7,73.3 29.2,73.3 29.6,72.9 29.6,72.2 C18.1 ; 7.805,59.405 8.745,59.405 10.015,58.135 D8.3 ; 27.45,70.05 C18.1 ; 33.65,69.1 38.6,69.1 IMU.1 ; LD1.1 55.2,24.8 62.8,24.8 63.4,25.4 63.4,32.441 60.715,35.126 60.715,48.509 60.572,48.652 60.572,50.163 60.715,50.306 D3.11
  Bottom Layer w0.254: XS5.5 9.047,26.9 ; C9.1 C7.1 ; v1(16.162,34.015) 9.047,26.9 ; v1(25,53.136) 25,52.5 ; C3.1 23.959,60.459 23.959,53.541 25,52.5 ; XS6.5 25.58,4.28 22.988,1.688 22.212,1.688 21.724,2.176 21.724,5.576 21.407,5.893 18.854,5.893 17.147,7.6 C7.1 ; C4.1 25.9,50.876 25.7,51.076 C2.1 25,52.5 ; C1.1@27.4,61.5 v1(28.8,61.5) ; v1(28.805,28.4) 28.805,28.1 v1(30.005,26.9) 9.047,26.9 ; v1(32.163,47.651) 30.349,47.651 29.463,48.537 v1(29.463,48.651) 29.4,48.714 29.4,49.3 30.8,50.7 C5.1 35.694,50.7 35.794,50.6 R3.1 ; v1(39.5,63.9) v1(39.5,66.5) ; XS6.20 36.73,13.73 20.83,13.73 C12.1 17,9.9 C10.1 15.5,9.7 C7.1 ; GND.1 GND.2 ; v1(46.692,57.938) 44.655,55.9 C6.1 38.527,54.473 38.527,52.527 R3.1 ; v1(49.285,50.6) R3.1
GREEN: D3.6 R7.1 XS1.4 | length 31.1
  Top Layer w0.254: D3.6 54.365,30.535 R7.1 60.23,26.1 60.25,26.08 XS1.4
GREEN_LED: D1.21 D3.18 | length 32.3
  Top Layer w0.15: D1.21 29.85,61.911
  Top Layer w0.254: 29.85,61.911 29.85,63.35 31.8,65.3 53.505,65.3 55.635,63.17 D3.18
NetC11_1: C11.1 D2.4 R1.1 | length 33.1
  Top Layer w0.254: v1(9.227,14.097) 10.424,12.9 12.196,12.9 12.783,13.488 ; v1(12.783,15.8) 12.783,13.488 ; D2.4 19.921,11.85 18.161,10.091 18.161,5.556 17.66,5.055 16.06,5.055 12.783,8.331 12.783,13.488
  Bottom Layer w0.254: v1(9.227,14.097) 9.837,14.707 11.615,14.707 12.301,14.021 12.379,14.021 C11.1 ; v1(12.783,15.8) R1.1
NetCAN_Rx_2: CAN_Rx.2 R9.2 | length 2.3
  Top Layer w0.254: R9.2 24.95,33.9 25.2,34.15 CAN_Rx.2
NetCAN_Tx_2: CAN_Tx.2 R11.2 | length 2
  Top Layer w0.254: CAN_Tx.2 30.97,33.95 31.02,34 R11.2
NetD2_6: D2.6 L2.1 R1.2 | length 8.6
  Top Layer w0.254: v1(20.454,15.8) 20.454,13.75 D2.6
  Bottom Layer w0.254: L2.1 18.7,14.1 R1.2 v1(20.454,15.8)
NetD4_6: D4.6 R14.1 | length 1.9
  Top Layer w0.254: R14.1 40.2,23.444 40.365,23.609 D4.6
NetD4_7: D4.7 R13.1 | length 2
  Top Layer w0.254: D4.7 41.635,23.708 42,23.343 R13.1
NetENCODER_1: ENCODER.1 R17.1 | length 2.7
  Top Layer w0.254: R17.1 17,56.366 16.542,55.908 ENCODER.1
NetIMU_2: IMU.2 R5.2 | length 2.4
  Top Layer w0.254: IMU.2 42.958,68.8 43.058,68.9 R5.2
NetL1_1: L1.1 VD1.2 | length 2.9
  Bottom Layer w0.254: L1.1 13.3,4.2 VD1.2
NetLD1_2: LD1.2 R6.2 | length 1.9
  Top Layer w0.254: LD1.2 56.268,23.5 56.468,23.7 R6.2
NetLD2_2: LD2.2 R7.2 | length 2
  Top Layer w0.254: LD2.2 56.268,26.2 56.368,26.1 R7.2
NetPWR_2: PWR.2 R2.1 | length 16.8
  Top Layer w0.254: v1(10.831,13.669) 10.831,19.881 PWR.2
  Bottom Layer w0.254: v1(10.831,13.669) R2.1
NetR8_2: R8.2 WARNING.2 | length 1.9
  Top Layer w0.254: WARNING.2 56.319,18.5 56.419,18.4 R8.2
NetR10_2: R10.2 U_Tx.2 | length 1.9
  Top Layer w0.254: R10.2 38.107,34.2 38.157,34.15 U_Tx.2
NetR12_2: R12.2 U_Rx.2 | length 2.2
  Top Layer w0.254: U_Rx.2 43.771,34.35 44.121,34 R12.2
NetR20_2: R20.2 R24.2 XS6.10 | length 11.9
  Bottom Layer w0.254: R20.2 28.386,2 26.906,3.48 26.906,5.051 27.62,5.766 28.492,5.766 29.826,7.1 XS6.10 30.66,8.458 30.8,8.598 R24.2
NetR21_2: R21.2 R23.2 XS6.6 | length 5.3
  Bottom Layer w0.254: XS6.6 24.9,7.78 R21.2 R23.2
NRST: D1.7 R4.1 XS5.6 | length 59.5
  Top Layer w0.15: D1.7 36.158,55.95 38.527,53.581
  Top Layer w0.254: v1(37.193,39.167) 37.193,52.246 38.527,53.581
  Bottom Layer w0.254: XS5.6 4.26,28.067 4.2,28.127 R4.1 5.001,28.499 6.484,28.499 17.152,39.167 v1(37.193,39.167)
RED: D3.3 R8.1 XS1.1 | length 54.8
  Top Layer w0.254: v1(45.93,19.177) 45.93,19.467 45.179,20.219 45.179,22.896 46.54,24.257 46.54,38.34 50.555,42.355 D3.3 ; R8.1 60.205,18.4 60.265,18.46 XS1.1
  Bottom Layer w0.254: v1(45.93,19.177) 46.647,18.46 XS1.1
RED_LED_WARNING: D1.11 D3.21 | length 19.5
  Top Layer w0.15: D1.11 39.387,57.95
  Top Layer w0.254: 39.387,57.95 40.226,57.111 47.721,57.111 51.825,61.214 D3.21
RS-485-A: R14.2 R15.1 R21.1 XS6.2 | length 28.2
  Top Layer w0.254: v1(29.09,12.903) 37.287,21.1 R14.2 40.2,20.292 40.4,20.092 R15.1
  Bottom Layer w0.254: XS6.2 21.826,7.1 21.826,8.426 R21.1 26.303,12.903 v1(29.09,12.903)
RS-485-B: R13.2 R15.2 R20.1 XS6.9 | length 23.8
  Top Layer w0.254: XS6.9 31.935,5.835 31.935,9.335 R15.2 41.9,20.142 42,20.242 R13.2
  Bottom Layer w0.254: R20.1 30.6,3.226 30.66,3.286 XS6.9
SPI_CS: D1.14 D10.12 | length 19.2
  Top Layer w0.254: 31.6,67.8 31.6,67.2 32.7,66.1 v1(33.5,66.1) ; D1.14 33.35,61.45 v1(34.6,62.7)
  Bottom Layer w0.254: v1(33.5,66.1) 34.1,66.1 35.5,67.5 37.2,67.5 38.5,66.2 38.5,64 37.2,62.7 v1(34.6,62.7)
SPI_INT1: D1.13 D10.4 | length 28.7
  Top Layer w0.254: 33.65,69.85 34.85,69.85 v1(35,70) ; D1.13 33.85,60.55 34.2,60.9 42.4,60.9 v1(44.5,63)
  Bottom Layer w0.254: v1(35,70) 41.7,70 44.5,67.2 v1(44.5,63)
SPI_INT2: D1.12 D10.9 | length 36.9
  Top Layer w0.254: D10.9 31.85,69.35 v1(32.1,69.1) ; D1.12 38.55,58.45 38.8,58.7 44.9,58.7 46,59.8 v1(46,63)
  Bottom Layer w0.254: v1(32.1,69.1) 35,72 41.1,72 46,67.1 v1(46,63)
SPI_MISO: D1.16 D10.1 | length 13.4
  Top Layer w0.254: D1.16 32.35,62.85 v1(32.5,63) ; 33.65,68.35 34.65,68.35 v1(35,68)
  Bottom Layer w0.254: v1(32.5,63) 30.9,64.6 30.9,66 32.9,68 v1(35,68)
SPI_MOSI: D1.17 D10.14 | length 12.4
  Top Layer w0.254: D1.17 31.85,62.35 31.6,62.6 31.6,63.4 32.2,64 v1(32.7,64) ; 32.6,67.8 33.2,67.2 34.8,67.2 v1(35.5,66.5)
  Bottom Layer w0.254: v1(32.7,64) 33,64 v1(35.5,66.5)
SPI_SCK: D1.15 D10.13 | length 16.2
  Top Layer w0.254: 32.1,67.8 32.1,67.4 32.7,66.8 34,66.8 35.1,65.7 36.2,65.7 v1(37,66.5) ; D1.15 32.85,62.05 34.2,63.4 v1(36.5,63.4)
  Bottom Layer w0.254: v1(36.5,63.4) 36.5,66 v1(37,66.5)
SWCLK: D1.37 XS5.9 | length 46.9
  Top Layer w0.15: 28.35,49.374 D1.37
  Top Layer w0.254: v1(27.312,48.336) 28.35,49.374
  Bottom Layer w0.254: XS5.9 2.979,20.561 2.979,29.921 20.262,47.205 26.18,47.205 v1(27.312,48.336)
SWDIO: D1.34 XS5.10 | length 62.4
  Top Layer w0.15: 24.65,53.95 D1.34
  Top Layer w0.254: v1(24.108,48.797) 24.108,53.408 24.65,53.95
  Bottom Layer w0.254: XS5.10 2.471,18.529 2.471,30.471 6.6,34.6 6.6,48.833 9.71,51.943 20.962,51.943 v1(24.108,48.797)
USART1-RX: D1.31 D3.15 D4.1 U_Rx.1 | length 89.9
  Top Layer w0.15: 23.119,55.45 D1.31
  Top Layer w0.254: v1(22.867,55.702) 23.119,55.45 ; U_Rx.1 42.9,31.146 42.905,31.141 D4.1@42.905,30.483 ; D4.1 D4.1@42.905,30.483 ; v1(52.814,60.3) 53.753,59.36 ; D3.15 59.445,60.63 58.175,59.36 53.753,59.36 ; D4.1@42.905,30.483 40.7,32.688 40.7,48.516 51.544,59.36 53.753,59.36
  Bottom Layer w0.254: v1(22.867,55.702) 22.867,61.767 24,62.9 28.6,62.9 31.5,60 52.514,60 v1(52.814,60.3)
USART1-TX: D1.42 D3.14 D4.4 U_Tx.1 | length 63.9
  Top Layer w0.15: v1@30.85,49.599 D1.42
  Top Layer w0.254: v1@30.85,49.599 v1(30.868,49.581) ; D4.4 39.095,31.242 39.1,31.247 U_Tx.1 39.961,33.461 v1(39.961,41.275) ; v1(59.748,55.144) 60.715,56.111 D3.14
  Bottom Layer w0.254: v1(30.868,49.581) 31.655,49.581 ; v1(39.961,41.275) 31.655,49.581 ; v1(59.748,55.144) 54.185,49.581 31.655,49.581
USART1_DE: D1.33 D4.2 D4.3 | length 42
  Top Layer w0.15: 24.391,54.45 D1.33
  Top Layer w0.254: v1(24.162,37.745) 23.059,38.848 23.059,50.157 23.6,50.698 23.6,53.659 24.391,54.45 ; v1(40.365,31.471) D4.3 D4.2
  Bottom Layer w0.254: v1(24.162,37.745) 30.436,31.471 v1(40.365,31.471)
USART_RX_ECHO: D3.9 XS3.1 | length 64
  Top Layer w0.254: v1(58.175,37.797) D3.9
  Bottom Layer w0.254: v1(58.175,37.797) 43.06,22.682 43.06,18.872 51.213,10.719 60.205,10.719 61.1,11.614 XS3.1
USART_TX_ECHO: D3.10 XS3.2 | length 57.5
  Top Layer w0.254: v1(59.445,36.781) D3.10
  Bottom Layer w0.254: XS3.2 51.1,12.204 44.33,18.974 44.33,21.666 v1(59.445,36.781)
VCC: VD1.1 XS6.1 | length 4.2
  Bottom Layer w0.5: VD1.1 19.64,3.7
  Bottom Layer w1: 19.64,3.7 XS6.1
VDD_IMU: C19.2 D9.2 D10.8 | length 14.4
  Top Layer w0.254: v1(22,69.1) D9.2 ; v1(28.7,66.8) C19.2 29.5,68 29.6,68.1 29.6,69.7 29.75,69.85 30.55,69.85
  Bottom Layer w0.254: v1(22,69.1) 26.2,69.1 28.5,66.8 v1(28.7,66.8)
YELLOW: D3.5 R6.1 XS1.3 | length 62.6
  Top Layer w0.254: D3.5 53.095,40.541 47.708,35.154 47.708,19.609 50.68,16.637 62.491,16.637 63.4,17.546 63.4,22.8 62.66,23.54 XS1.3 60.314,23.54 60.154,23.7 R6.1
YELLOW_LED: D1.20 D3.19 | length 30
  Top Layer w0.15: D1.20 30.35,60.969
  Top Layer w0.254: 30.35,60.969 30.35,63.05 32.1,64.8 52.837,64.8 54.365,63.272 D3.19
pads on no net: D1.2 D1.3 D1.4 D1.5 D1.6 D1.10 D1.19 D1.22 D1.25 D1.26 D1.27 D1.38 D1.39 D1.40 D1.41 D1.43 D1.45 D5.5 D6.4 D7.4 D8.4 D10.10 D10.11 XS5.4 XS5.7 XS5.8 XS6.11 XS6.12

## Silkscreen, mask and mechanical layers (free items; w line width, h text height)
Top Overlay:
  circle w0.254: c59,69 r4
  circle w0.254: c5,69 r4
  circle w0.254: c45.9,44.5 r4
  circle w0.254: c5,5 r4
  circle w0.254: c59,5 r4
  lines w0.1: 23.2,42.5 24.2,43.5 ; 24.2,38.5 24.2,43.5 ; 25.2,42.5 24.2,43.5 ; 31,37 32,36 ; 32,40.5 32,36 ; 33,37 32,36 ; 35.8,37 36.8,36 ; 36.8,40.9 36.8,36 ; 37.8,37 36.8,36 ; 44,39 45,40 ; 45,35.5 45,40 ; 46,39 45,40
Bottom Overlay:
  circle w0.254: c59,5 r4
  circle w0.254: c59,69 r4
  circle w0.254: c5,69 r4
  circle w0.254: c5,5 r4
  circle w0.254: c45.9,44.5 r4
Mechanical 4:
  the board outline again, w0.3

## Text inside footprints (layer, text, board x,y; h text height)
XS6: Top Overlay "19" at 42.36,1.86 h1.5; Top Overlay "20" at 42.11,8.3 h1.5; Top Overlay "1" at 20.25,1.86 h1.5; Top Overlay "2" at 20,8.3 h1.5